# Altium PCB NucciF.PcbDoc (part 2 of 3)
Units mm, origin at the board's own origin, x right, y up, seen from the top; angles counter-clockwise.
Board outline 88.1 x 36.1 mm, 4 copper layers (Top Layer, inner 1, inner 2, Bottom Layer), stack 1.588 mm thick; 144 components, 118 nets, 519 pads, 140 vias.
Unrouted connection lines stored in the file: 6.
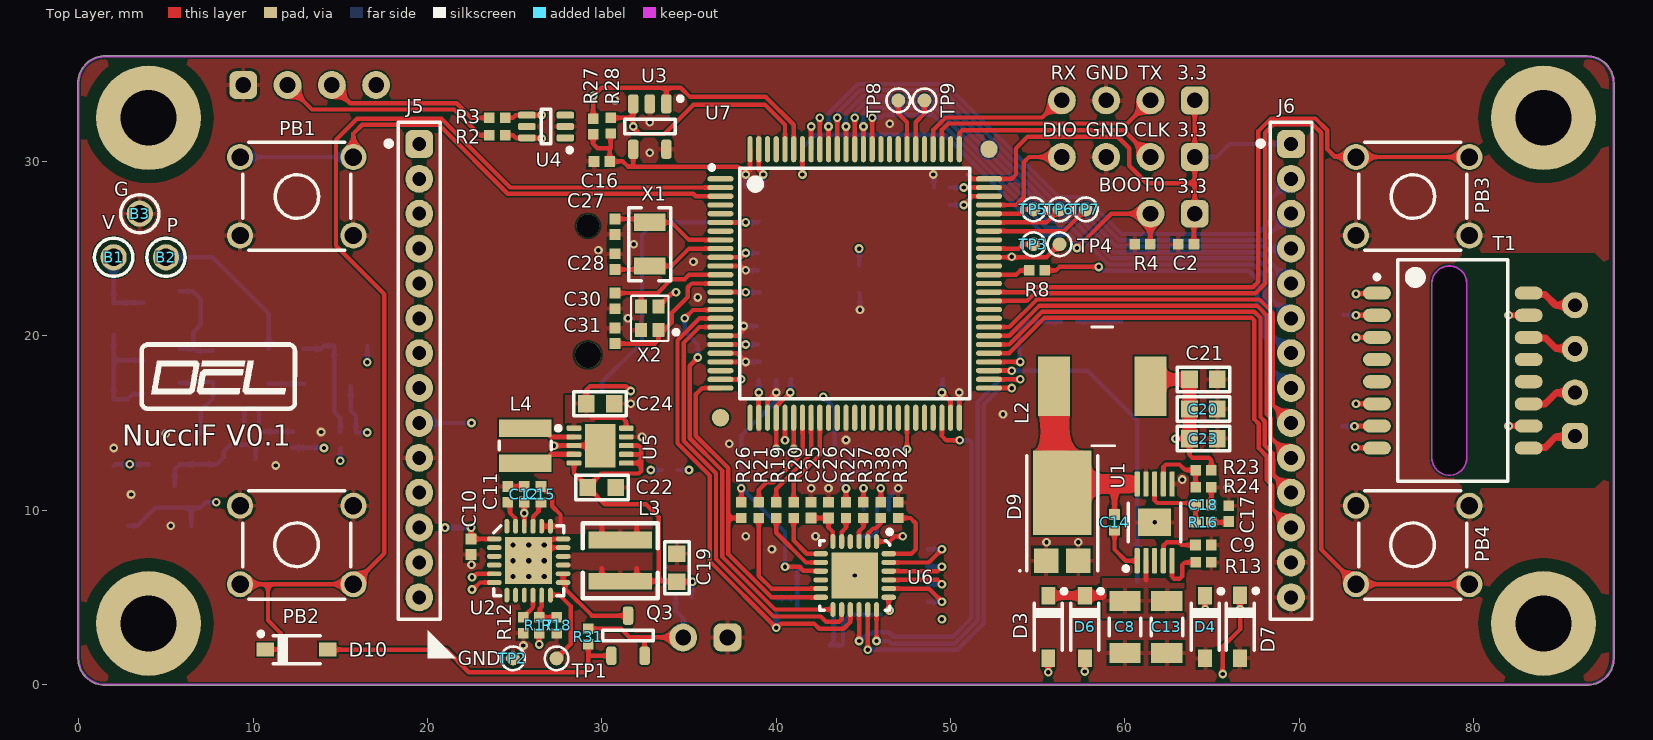
[diagram p0: Top Layer view]

## Part data (continued)
R16: library part R0402_20K_1%_0.0625W_100PPM, "Resistor - 1%", Case=0402, Manufacturer=GENERIC, Manufacturer1 ComponentHeight=0.4mm, Manufacturer1 Example=PHYCOMP, Manufacturer1 Part Number=232270672003, Power=0.0625W, Tolerance=±1%, Author="CERN DEM JLC", Component Type=Standard, CreateDate=12/3/2007, HelpURL=\\cern.ch\dfs\Applications\Altium\Datasheets\R0402_Phycomp_RC0402.pdf, LatestRevisionDate=3/13/2008, Manufacturer Part Number=R0402_20K_1%_0.0625W_100PPM, Mounted=Yes, Part Description="General Purpose Thick Film Chip Resistor", Part Number=R0402_20K_1%_0.0625W_100PPM, Pin Count=2, SMD=Yes, Socket=No, Status="Not recommended", TC=±100ppm/°C
R19 R20 R21: library part R0402_10R_1%_0.0625W_200PPM, "Resistor - 1%", Case=0402, Manufacturer=GENERIC, Manufacturer1 ComponentHeight=0.4mm, Manufacturer1 Example=PHYCOMP, Manufacturer1 Part Number=232270671009, Power=0.0625W, Tolerance=±1%, Author="CERN DEM JLC", Component Type=Standard, CreateDate=24.06.2009, HelpURL=\\cern.ch\dfs\Applications\Altium\Datasheets\R0402_Phycomp_RC0402.pdf, LatestRevisionDate=13.03.2008, Manufacturer Part Number=R0402_10R_1%_0.0625W_200PPM, Mounted=Yes, Part Description="General Purpose Thick Film Chip Resistor", Part Number=R0402_10R_1%_0.0625W_200PPM, Pin Count=2, SMD=Yes, Socket=No, Status="Not recommended", TC=±200ppm/°C
R23: library part R0402_51K_1%_0.0625W_100PPM, "Resistor - 1%", Case=0402, Manufacturer=GENERIC, Manufacturer1 ComponentHeight=0.4mm, Manufacturer1 Example=PHYCOMP, Manufacturer1 Part Number=232270674703, Power=0.0625W, Tolerance=±1%, Author="CERN DEM JLC", Component Type=Standard, CreateDate=12/3/2007, HelpURL=\\cern.ch\dfs\Applications\Altium\Datasheets\R0402_Phycomp_RC0402.pdf, LatestRevisionDate=3/13/2008, Manufacturer Part Number=R0402_51K_1%_0.0625W_100PPM, Mounted=Yes, Part Description="General Purpose Thick Film Chip Resistor", Part Number=R0402_51K_1%_0.0625W_100PPM, Pin Count=2, SMD=Yes, Socket=No, Status="Not recommended", TC=±100ppm/°C
R24: library part R0402_10K_1%_0.0625W_100PPM, "Resistor - 1%", Case=0402, Manufacturer=GENERIC, Manufacturer1 ComponentHeight=0.4mm, Manufacturer1 Example=PHYCOMP, Manufacturer1 Part Number=232270671003, Power=0.0625W, Tolerance=±1%, Author="CERN DEM JLC", Component Type=Standard, CreateDate=12/3/2007, HelpURL=\\cern.ch\dfs\Applications\Altium\Datasheets\R0402_Phycomp_RC0402.pdf, LatestRevisionDate=3/13/2008, Manufacturer Part Number=R0402_10K_1%_0.0625W_100PPM, Mounted=Yes, Part Description="General Purpose Thick Film Chip Resistor", Part Number=R0402_10K_1%_0.0625W_100PPM, Pin Count=2, SMD=Yes, Socket=No, Status="Not recommended", TC=±100ppm/°C
R25: library part R0402_1K5_1%_0.0625W_100PPM, "Resistor - 1%", Case=0402, Manufacturer=GENERIC, Manufacturer1 ComponentHeight=0.4mm, Manufacturer1 Example=PHYCOMP, Manufacturer1 Part Number=232270671502, Power=0.0625W, Tolerance=±1%, Author="CERN DEM JLC", Component Type=Standard, CreateDate=03.12.2007, HelpURL=\\cern.ch\dfs\Applications\Altium\Datasheets\R0402_Phycomp_RC0402.pdf, LatestRevisionDate=13.03.2008, Manufacturer Part Number=R0402_1K5_1%_0.0625W_100PPM, Mounted=Yes, Part Description="General Purpose Thick Film Chip Resistor", Part Number=R0402_1K5_1%_0.0625W_100PPM, Pin Count=2, SMD=Yes, Socket=No, Status="Not recommended", TC=±100ppm/°C
R26 R27 R28: library part R0402_2K_1%_0.0625W_100PPM, "Resistor - 1%", Case=0402, Manufacturer=GENERIC, Manufacturer1 ComponentHeight=0.4mm, Manufacturer1 Example=PHYCOMP, Manufacturer1 Part Number=232270672002, Power=0.0625W, Tolerance=±1%, Author="CERN DEM JLC", Component Type=Standard, CreateDate=03.12.2007, HelpURL=\\cern.ch\dfs\Applications\Altium\Datasheets\R0402_Phycomp_RC0402.pdf, LatestRevisionDate=13.03.2008, Manufacturer Part Number=R0402_2K_1%_0.0625W_100PPM, Mounted=Yes, Part Description="General Purpose Thick Film Chip Resistor", Part Number=R0402_2K_1%_0.0625W_100PPM, Pin Count=2, SMD=Yes, Socket=No, Status="Not recommended", TC=±100ppm/°C
R29 R30: library part R0402_0R_JUMPER, "Resistor - 1%", Case=0402, Manufacturer=GENERIC, Manufacturer1 ComponentHeight=0.4mm, Manufacturer1 Example=PHYCOMP, Manufacturer1 Part Number=232270591001, Author="CERN DEM JLC", Component Type=Standard, CreateDate=12/3/2007, HelpURL=\\cern.ch\dfs\Applications\Altium\Datasheets\R0402_Phycomp_RC0402.pdf, LatestRevisionDate=3/13/2008, Manufacturer Part Number=R0402_0R_JUMPER, Mounted=DNP, Part Description="1A (0.05R Max DC Resistance) Zero Ohm Jumper", Part Number=R0402_0R_JUMPER, Pin Count=2, SMD=Yes, Socket=No, Status="Not recommended"
R33 R34 R35 R36: library part R0402_49R9_1%_0.0625W_100PPM, "Resistor - 1%", Case=0402, Manufacturer=GENERIC, Manufacturer1 ComponentHeight=0.4mm, Manufacturer1 Example=PHYCOMP, Manufacturer1 Part Number=232270674702, Power=0.0625W, Tolerance=±1%, Author=ELMAN, Component Type=Standard, CreateDate=20.05.2015, HelpURL=\\cern.ch\dfs\Applications\Altium\Datasheets\R0402_Phycomp_RC0402.pdf, LatestRevisionDate=20.05.2015, Manufacturer Part Number=R0402_49R9_1%_0.0625W_100PPM, Mounted=Yes, Part Description="General Purpose Thick Film Chip Resistor", Part Number=R0402_49R9_1%_0.0625W_100PPM, Pin Count=2, SMD=Yes, Socket=No, Status="Not recommended", TC=±100ppm/°C
R37: library part R0402_4K7_1%_0.0625W_100PPM, "Resistor - 1%", Case=0402, Manufacturer=GENERIC, Manufacturer1 ComponentHeight=0.4mm, Manufacturer1 Example=PHYCOMP, Manufacturer1 Part Number=232270674702, Power=0.0625W, Tolerance=±1%, Author="CERN DEM JLC", Component Type=Standard, CreateDate=2007-12-03, HelpURL=\\cern.ch\dfs\Applications\Altium\Datasheets\R0402_Phycomp_RC0402.pdf, LatestRevisionDate=2008-03-13, Manufacturer Part Number=R0402_4K7_1%_0.0625W_100PPM, Mounted=Yes, Part Description="General Purpose Thick Film Chip Resistor", Part Number=R0402_4K7_1%_0.0625W_100PPM, Pin Count=2, SMD=Yes, Socket=No, Status="Not recommended", TC=±100ppm/°C
SK1: library part EEMB_BH500, "Battery holder", Manufacturer=EEMB, Author=DEL, ComponentHeight=4mm, Component Type=Standard, CreateDate=22.10.2017, Device=BH500, LatestRevisionDate=22.10.2017, Manufacturer Part Number=BH500, Mounted=Yes, Part Description="Battery holder for CR and LIR series1216 to 1220,1225", Part Number=EEMB_BH500, Pin Count=2, SMD=Yes, Socket=No, Status=None
T1: library part XFMR_LF-H84P-1, "Signal Transformers 10/100 Base-T XFMR 1 Port LAN", Manufacturer=LANKom, Part Number=PE-68678, Author=DEL, ComponentHeight=2mm, Component Type=Standard, CreateDate=10.10.2017, LatestRevisionDate=10.10.2017, Manufacturer Part Number=LF-H84P-1, Mounted=Yes, Part Description="10/100BASE-Tx PC Card LAN Magnetics Module", Pin Count=16, SMD=No, Socket=No, Status=None
TP1 TP2 TP3 TP4 TP5 TP6 TP7 TP8 TP9: library part TP_SMD_0.8MM, Author=DEL, Component Type="Standard (No BOM)", ComponentHeight=0mm, CreateDate=14.11.2017, Family="Test Point", LatestRevisionDate=14.11.2017, Mounted=No, PackageDescription="0.8mm round SMD Pad", Part Description="0.8mm round SMD Pad", Part Number=TP_SMD_0.8MM, Pin Count=1, SMD=No, Socket=No, Status=None
U1: library part TPS54260DGQ, Case="DGQ 10", Manufacturer="TEXAS INSTRUMENTS", Author=DEL, Component Type=Standard, ComponentHeight=1.1mm, CreateDate=6/12/2025, Device=TPS54260, LatestRevisionDate=6/12/2025, Manufacturer Part Number=TPS54260DGQ, Mounted=Yes, PackageDescription="SOP, 0.50mm, pitch; 10 pin, 3.00mm W X 3.00mm L X 1.10mm H body (w/thermal tab  1.57 X 1.88 mm), IPC Medium Density", Part Description="3.5-V to 60-V Input, 2.5-A, Step-Down Converter", Part Number=TPS54260DGQ, Pin Count=11, SMD=Yes, Socket=No
U2: "5A Single Cell Li-Ion Switching Battery Charger with Power Path Management and USB-OTG Boost Mode", Manufacturer=Richtek, Author=DEL, Component Type=Standard, ComponentHeight=1mm, CreateDate=6/3/2025, Device=RT9466, LatestRevisionDate=6/3/2025, Manufacturer Part Number=RT9466, Mounted=Yes, PackageDescription="QFN,0.50mm pitch,square;6 pin X 6 pin,4.0mm X 4.0mm X 1.00mm H body (w/thermal tab 2.7 X 2.7mm),  IPC Medium Density", Part Description="Linear Li-Ion Charger with LDO", Part Number=RT9466, Pin Count=25, SMD=Yes, Socket=No
U3: library part 24AA08T-I/OT, "I2C™ Serial EEPROM SOT23-5 Package", Case=SOT23-5, Manufacturer=MICROCHIP, Author=DEL, ComponentHeight=1.45mm, Component Type=Standard, CreateDate=09.11.2017, Device=24AA08, LatestRevisionDate=09.11.2017, Manufacturer Part Number=24AA08T-I/OT, Mounted=Yes, PackageDescription="SOT, 0.95mm pitch; 5 pin, 1.60mm W X 2.90mm L X 1.45mm H body, IPC Medium Density", Part Description="8K Serial EEPROM", Part Number=24AA08T-I/OT, Pin Count=5, SMD=Yes, Socket=No
U4: library part NUP4202W1, "ESD Protection Diode, Low  Clamping Voltage", Case=SOT363, Manufacturer="ON SEMICONDUCTOR", Manufacturer Part Number=NUP4202W1T2G, Author=DEL, ComponentHeight=1.1mm, Component Type=Standard, CreateDate=10.11.2017, Device=NUP4202, LatestRevisionDate=10.11.2017, Mounted=Yes, PackageDescription="SOT363, 0.65mm pitch; 6 pin, 1.25mm W X 2mm L, IPC Medium Density", Part Description="ESD Protection Diode, Low  Clamping Voltage", Part Number=NUP4202W1, Pin Count=6, SMD=Yes, Socket=No
U5: "Single Inductor Buck-Boost Converter With 1.8-A Switches", Case=VSON10, Manufacturer="TEXAS INSTRUMENTS", Manufacturer Part Number=TPS63001DRCT, Author=DEL, Component Type=Standard, ComponentHeight=1mm, CreateDate=8/23/2025, Device=TPS63001, LatestRevisionDate=8/23/2025, Mounted=Yes, PackageDescription="VSON, 10 pin, 3.0mm X 3.0mm X 1mm", Part Description="Single Inductor Buck-Boost Converter With 1.8-A Switches", Part Number=TPS63001, Pin Count=10, SMD=Yes, Socket=No
U6: library part LAN8720A-CP-TR, Case=QFN24, Manufacturer=Microchip, Author=DEL, ComponentHeight=1mm, Component Type=Standard, CreateDate=10.08.2017, Device=LAN8720, LatestRevisionDate=11.10.2017, Manufacturer Part Number=LAN8720A-CP-TR, Mounted=Yes, PackageDescription="QFN,0.50mm pitch,square;6 pin X 6 pin,4.0mm X 4.0mm X 1.00mm H body (w/thermal tab 2.65 X 2.65mm)", Part Description="Small Footprint RMII 10/100 Ethernet Transceiver with HP Auto-MDIX Support", Part Number=LAN8720A-CP-TR, Pin Count=25, SMD=Yes, Socket=No
U7: "ARM Cortex-M4 32b MCU+FPU, 210DMIPS, up to 1MB Flash/192+4KB RAM, USB OTG HS/FS, Ethernet, 17 TIMs, 3 ADCs, 15 comm. interfaces & camera", Case=LQFP100, Manufacturer="ST Microelectronics", Author=DEL, Component Type=Standard, ComponentHeight=1.6mm, CreateDate=6/3/2025, Device=STM32F407VGT6, LatestRevisionDate=6/3/2025, Manufacturer Part Number=STM32F407VGT6, Mounted=Yes, PackageDescription="QFP, 0.50mm Pitch, Square; 100 Pin,14.00mm L X 14.00mm W X 1.60mm H Body", Part Description="ARM Cortex-M4 32b MCU+FPU, 210DMIPS, up to 1MB Flash/192+4KB RAM, USB OTG HS/FS, Ethernet, 17 TIMs, 3 ADCs, 15 comm. interfaces & camera", Part Number=STM32F407VGT6, Pin Count=100, SMD=Yes, Socket=No
X1: library part 32.768KHz_KX–327NHT, "Quartz Crystal", Manufacturer=GEYER, Manufacturer Part Number=KX–327NHT, Author=D_EL, ComponentHeight=0.8mm, Component Type=Standard, CreateDate=15.06.2017, LatestRevisionDate=15.06.2017, Mounted=Yes, PackageDescription="2 pin, 3.20mm L X 1.50mm W X 0.80mm H", Part Description="Quartz Crystal ±20ppm", Part Number=32.768KHz_KX–327NHT, Pin Count=2, SMD=Yes, Socket=No
X2: library part 24MHZ_XRCGB24M000F3M00R0, "Crystal 4 pins 1=XTAL 2=GND3=XTAL 4=GND", Manufacturer=MURATA, Manufacturer Part Number=7XRCGB24M000F3M00R0, Author=D_EL, ComponentHeight=0.7mm, Component Type=Standard, CreateDate=17.06.2017, LatestRevisionDate=17.06.2017, Mounted=Yes, PackageDescription="Oscillator, corner concave; 4 pin, 2.00mm L X 1.60mm W X 0.65mm H, IPC Medium Density", Part Description="± 30ppm at (25±3°C), -30°C to +85°C, 6pF, Ceramic SMD Crystal, Type HCR2016", Part Number=24MHZ_XRCGB24M000F3M00R0, Pin Count=4, SMD=Yes, Socket=No

## Free pads (board coordinates)
  round 6 hole 3.2: MH1(4,32.5) MH2(4,3.5) MH3(84,32.5) MH4(84,3.5)

## Via types
v1: diameter 0.5, hole 0.25, Top Layer to Bottom Layer, tented both sides, 131 vias
v2: diameter 0.6, hole 0.3, Top Layer to Bottom Layer, tented bottom, 9 vias